# Altium PCB Range_LED.PcbDoc
Units mil, origin at the board's own origin, x right, y up, seen from the top; angles counter-clockwise.
Board outline 420 x 505 mil, 2 copper layers (Top Layer, Bottom Layer); 7 components, 8 nets, 32 pads, 2 vias.
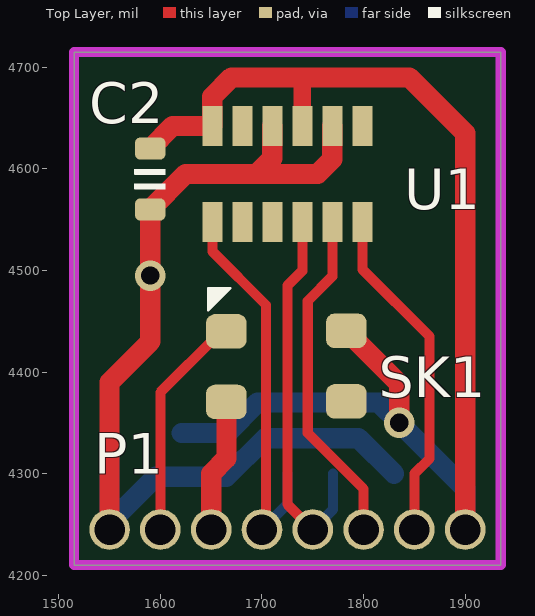
[diagram p0: Top Layer view]
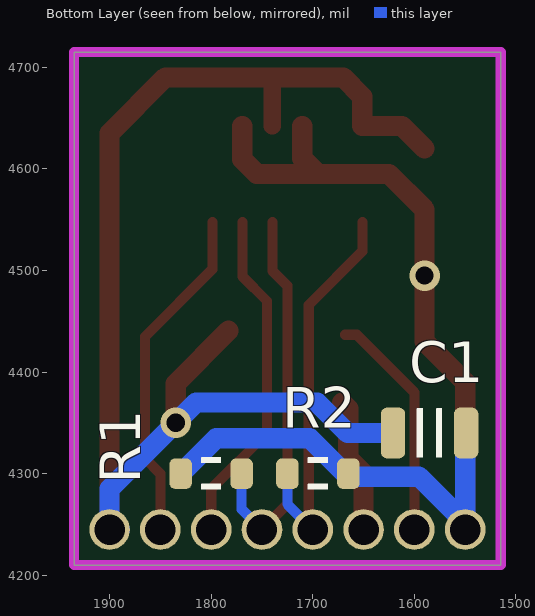
[diagram p1: Bottom Layer view, seen from below]
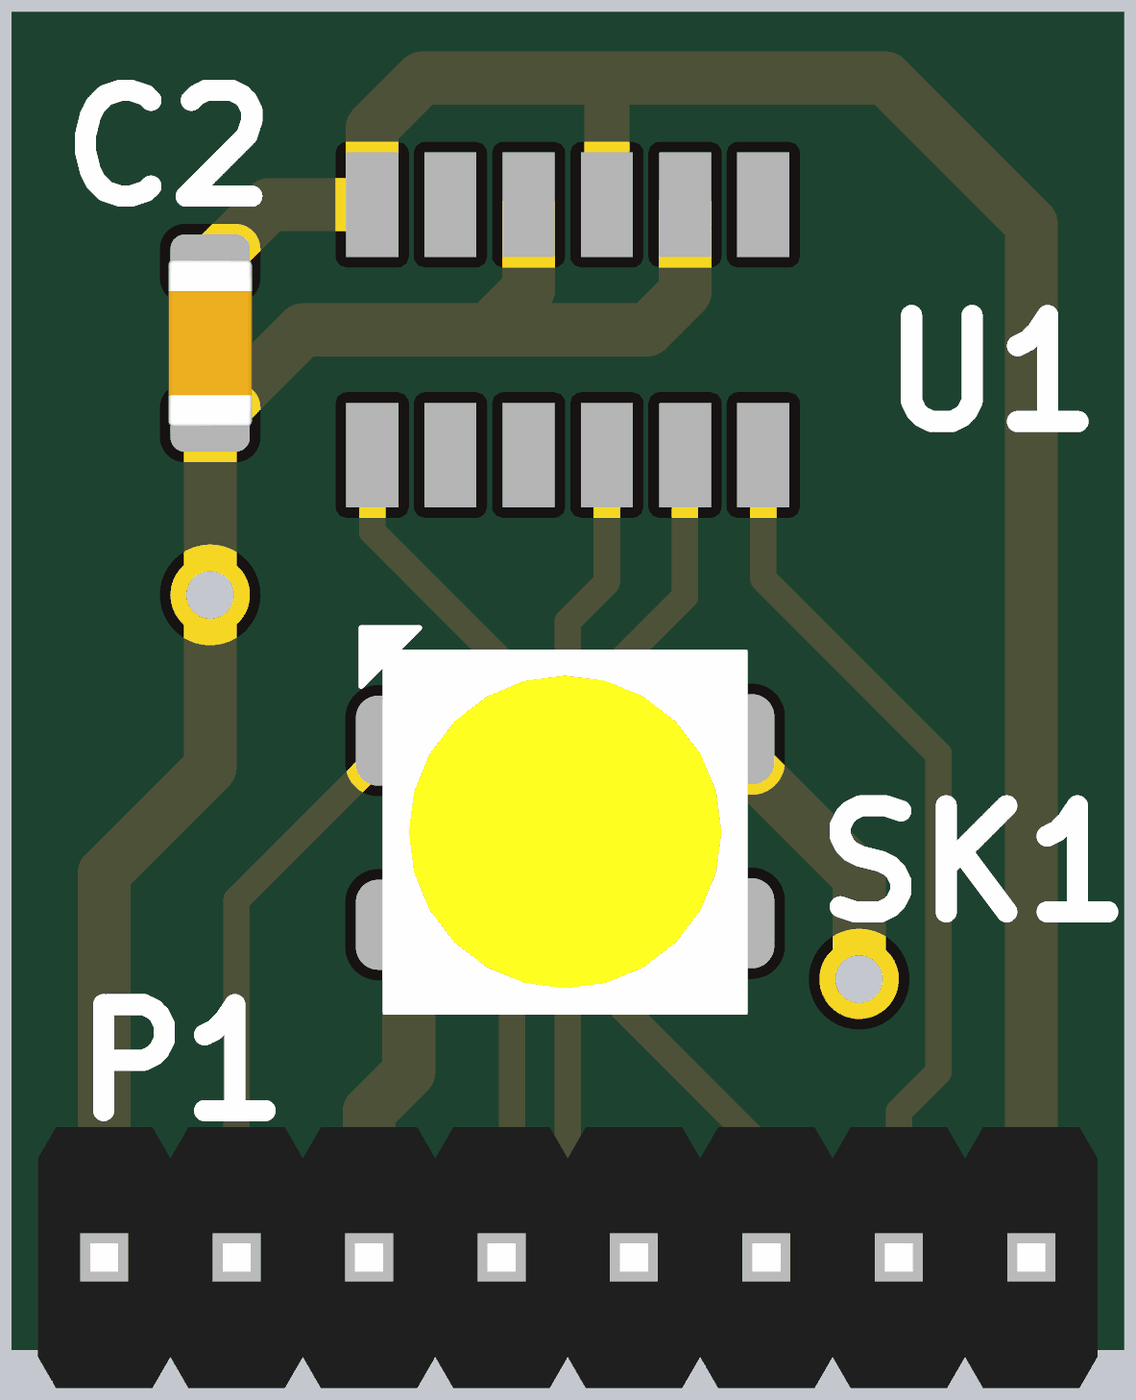
[diagram p2: 3D render of the assembled board from above, using the file's embedded part models]
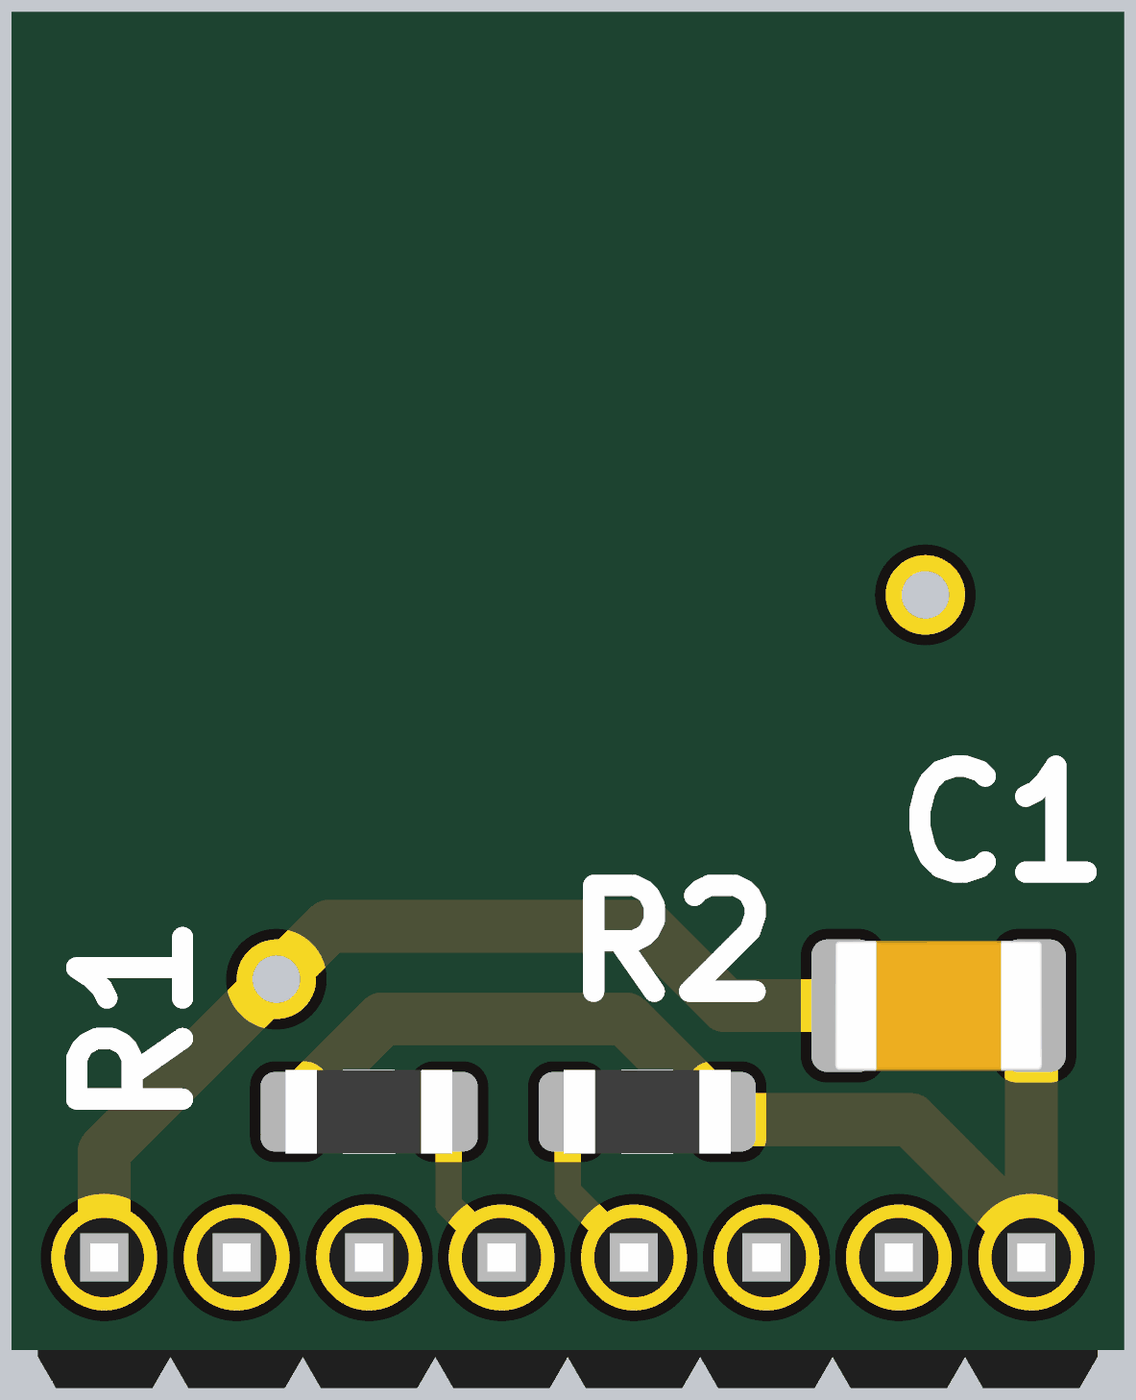
[diagram p3: 3D render of the assembled board from below, using the file's embedded part models]

## Layer stack, top to bottom
Top Solder: solder mask 0.4, Solder Resist, Dk 3.5
Top Layer: signal copper 1.4
Dielectric 1: dielectric 12.6, FR-4, Dk 4.8
Bottom Layer: signal copper 1.4
Bottom Solder: solder mask 0.4, Solder Resist, Dk 3.5

## Board outline
1515,4210 1515,4715 1935,4715 1935,4210

## Design rules (kind name [scope] priority, off if disabled: settings)
Clearance [All] p1: gap=10 ignorepadtopadclearanceinfootprint=TRUE except(0: Arc-Hole Track-Hole SMDPad-Hole THPad-Hole Via-Hole Fill-Hole Poly-Hole Region-Hole Text-Hole; 8: Arc-SMDPad Track-SMDPad SMDPad-Fill SMDPad-Poly SMDPad-Region)
PolygonConnect [All] p1: connectstyle=Relief reliefconductorwidth=10 reliefentries=4 polygonreliefangle="90 Angle" airgapwidth=10
RoutingVias [All] p1: holewidth=18 width=20 viastyle="Through Hole" minholewidth=18 minwidth=20 maxholewidth=18 maxwidth=30
SolderMaskExpansion [All] p1: expansion=4
Width Width_VCC28 [InNet('VCC2.8V')] p1: maxlimit=40 minlimit=20 preferedwidth=20 minimp=50.000000 maximp=50.000000 favimp=50.000000
Width Width_VCC [InNet('VCC5V')] p2: maxlimit=40 minlimit=20 preferedwidth=20 minimp=50.000000 maximp=50.000000 favimp=50.000000
Width Width_GND [InNet('GND')] p3: maxlimit=40 minlimit=15 preferedwidth=20 minimp=50.000000 maximp=50.000000 favimp=50.000000
Width [All] p4: maxlimit=20 minlimit=10 preferedwidth=10 toplayer_maxwidth=10 minimp=50.000000 maximp=50.000000 favimp=50.000000
30 further rules are at their usual default settings.

## Components (designator, comment, footprint, x,y, rotation, side; value= is the part's Value field where it differs from the comment)
C1 "Cap_0805" CAP_0805 1585,4340 r180 bottom value=10uF
C2 "Cap_0603" CAP_0603 1590,4590 r270 top value=0.1uF
P1 "HDR1x8_1.27" HDR1X8_1.27_180 1550,4245 r90 top
R1 "Res_0603" RES_0603 1800,4300 r0 bottom value=1K
R2 "Res_0603" RES_0603 1695,4300 r180 bottom value=1K
SK1 "LED_3535_SK6812" LED_3535_4P 1724,4405.55 r180 top
U1 "VL6180X" LGA12_ST_4.8X2.8X1MM 1725,4595 r90 top

## Footprints (in the part's own frame and the unit in brackets; to place one, negate y for a bottom-side part, rotate by r counter-clockwise, add the part's x,y. Pads: shape width x height; smd on the part's side, far side on the other; paste and mask are expansions set on the pad)
CAP_0603 [mil]
  rrect50% 22x30 smd: 1(-30,0) 2(30,0)
  silkscreen extent -10,-15 10,15, body extent -31,-16 31,16, height 31
CAP_0805 [mil]
  rrect50% 24x50 smd: 1(-36,0) 2(36,0)
  silkscreen extent -12,-24 12,24, body extent -39,-25 39,25, height 39
HDR1X8_1.27_180 [mil]
  round 40 hole 30: 1(0,0) 2(0,-50) 3(0,-100) 4(0,-150) 5(0,-200) 6(0,-250) 7(0,-300) 8(0,-350)
  body extent -49,-375 49,25, height 210
LED_3535_4P [mil]
  rrect50% 40x34 smd: 1(-59,34.45) 2(-59,-35) 3(59,-34.45) 4(59,35)
  silkscreen extent 55,-77 77,-55, body extent -69,-69 69,69, height 26
LGA12_ST_4.8X2.8X1MM [mm] "VL6180, LGA12 4.8X2.8X1MM"
  rect 1x0.5 smd: 1(-1.2,1.875) 2(-1.2,1.125) 3(-1.2,0.375) 4(-1.2,-0.375) 5(-1.2,-1.125) 6(-1.2,-1.875) 7(1.2,-1.875) 8(1.2,-1.125) 9(1.2,-0.375) 10(1.2,0.375) 11(1.2,1.125) 12(1.2,1.875)
RES_0603 [mil]
  rrect50% 22x30 smd: 1(-30,0) 2(30,0)
  silkscreen extent -10,-16 10,16, body extent -31,-16 31,16, height 18

## Part data
C1 C2: "Capacitor"
P1: "Header"
R1 R2: "Resistor"
SK1: "LED"
U1: "VL6180x Proximity and Light Sensor with Gesture Recognition    Supply Level: 2.8V (3.0V Max!)  Range: 0-10cm  Light Sensor: 0..100K Lux (16-bit output)  IR emitter: 850 nm  I2C Address: 0x29 (7-bit)", VDD="VDD: 2.8V  / Op. Temp: -20~70°C"

## Via types
v1: diameter 30, hole 18, Top Layer to Bottom Layer, 2 vias

## Nets (pads, with @x,y where several pads share a name; then routed paths per layer and width w, separated by ;. In a path a pad name is that pad's centre, name@x,y a point inside that pad or via, vN(x,y) a via of type N, cw(c..) or ccw(c..) an arc to the next point about the centre after c; other vN are vias at no path point)
GND: C1.1 C2.1 P1.8 SK1.2 U1.9 U1.12 | length 1305.2
  Top Layer w17: U1.9 1739.76,4690
  Top Layer w20: C2.1 1612.24,4642.24 U1.12 1651.18,4671.18 1670,4690 1739.76,4690 1845,4690 1900,4635 P1.8 ; SK1.2 1835,4388.55 v1(1835,4350)
  Bottom Layer w20: C1.1 1665.57,4340 1695.57,4370 1815,4370 v1(1835,4350) 1900,4285 P1.8 P1.8@1890,4245
GPIO_OUT: P1.4 R2.1 U1.1 | length 391.7
  Top Layer w10: U1.1 1651.18,4518.82 1704,4466 1704,4249 P1.4
  Bottom Layer w10: P1.4 1725,4270 R2.1
LED_DATA: P1.2 SK1.3 | length 226.8
  Top Layer w10: P1.2 1600,4380 1656.72,4436.72 SK1.3@1668.28,4436.72
SCL_2.8V: P1.6 U1.5 | length 335.6
  Top Layer w10: U1.5 1769.29,4494.29 1745,4470 1745,4340 1800,4285 P1.6
SDA_2.8V: P1.7 U1.6 | length 336.4
  Top Layer w10: U1.6 1798.82,4501.18 1865,4435 1865,4315 1850,4300 P1.7
SHDN_2.8V: P1.5 R1.1 U1.4 | length 387.5
  Top Layer w10: U1.4 1739.76,4499.76 1725,4485 1725,4270 P1.5 P1.5@1750,4250
  Bottom Layer w10: P1.5 1770,4265 R1.1
VCC2.8V: C1.2 C2.2 P1.1 R1.2 R2.2 U1.8 U1.10 | length 1022.8
  Top Layer w20: P1.1 1550,4390 1590,4430 v1(1590,4495) C2.2 1625,4595 1695,4595 ; U1.10 1710.24,4610.24 1695,4595 ; U1.8 1769.29,4609.29 1755,4595 1695,4595
  Bottom Layer w20: P1.1 P1.1@1550,4251.57 ; C1.2@1550,4321 P1.1@1550,4251.57 ; R1.2 1795,4335 1703,4335 1665,4297 1595.43,4297 P1.1@1550,4251.57
VCC5V: P1.3 SK1.4 | length 133.7
  Top Layer w20: P1.3 1650,4300 1665,4315 1665,4364 SK1.4@1671,4370
pads on no net: SK1.1 U1.2 U1.3 U1.7 U1.11

## Keep-outs
Keep-Out Layer:
  the board outline again, w10